# EAGLE board brd1 (EAGLE 7.3.0)
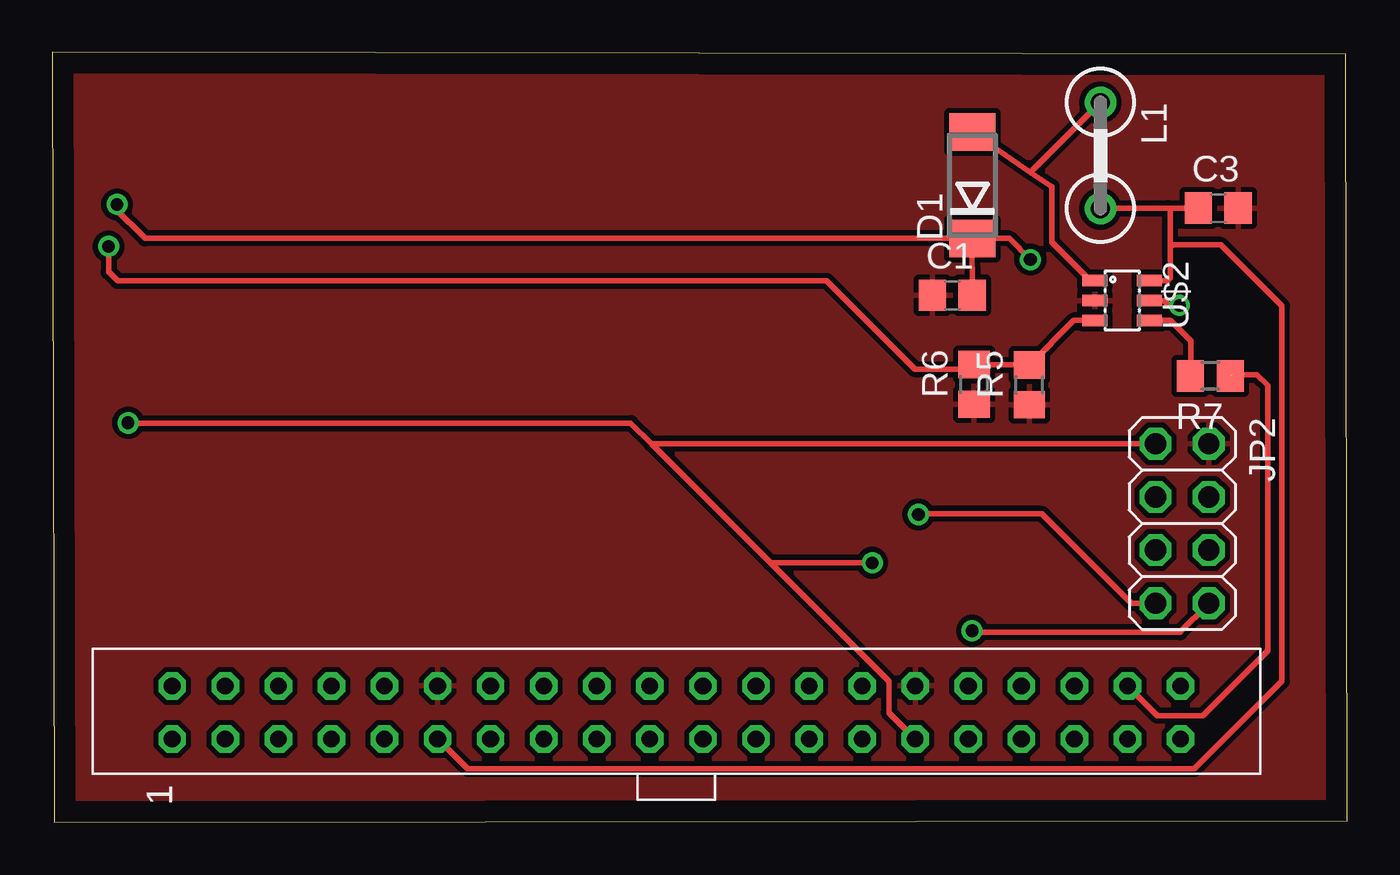
[diagram p0: board, top side]
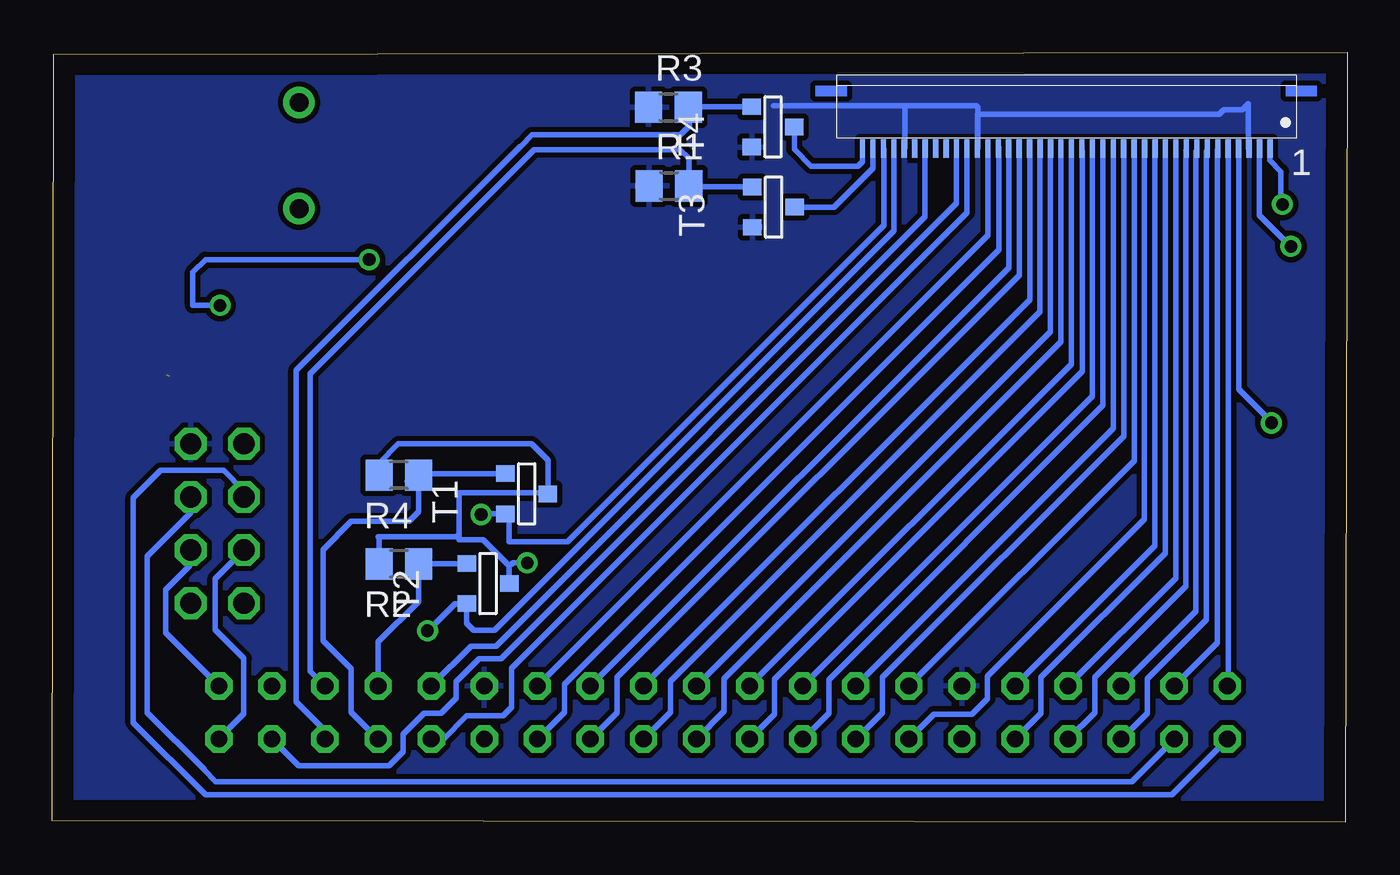
[diagram p1: board, bottom side, seen from below]

Size 61.98 x 36.85 mm. Coordinates in mm from the lower left corner, seen from the top.
Outline: 0.1,0 61.98,0.08 61.9,36.74 0,36.85 0.1,0
Copper layers (1*16): Top 0.035mm / dielectric 1.5mm / Bottom 0.035mm
Design rules "default": minimum track width 10mil, minimum drill 24mil, track to track 8mil, track to pad 8mil, pad to pad 8mil, via to via 8mil, smd to smd 8mil, copper to edge 40mil, drill to drill 8mil, minimum pad ring 10mil, minimum via ring 8mil, stop-mask expansion 4mil, vias tented up to drill 0mil, thermal gap 10mil

## Footprints (pad centres in the part's own frame; a part is rotated, then mirrored left to right if it is on the bottom)
C0805 = smd 1.3 x 1.5: 1 -0.95,0; 2 0.95,0
DO214AA = smd 1.8 x 2.2: A 2.55,0; C -2.55,0
2X04 = drill 1.016 octagon: 1 -3.81,-1.27; 2 -3.81,1.27; 3 -1.27,-1.27; 4 -1.27,1.27; 5 1.27,-1.27; 6 1.27,1.27; 7 3.81,-1.27; 8 3.81,1.27
BL02RN2 = drill 0.9 pad 1.5: 1 -2.54,0; 2 2.54,0
R0805 = smd 1.3 x 1.5: 1 -0.95,0; 2 0.95,0
SOT-23 = smd 0.787 x 0.889: 1 0.025,-1.016; 2 -0.94,1.016; 3 0.991,1.016
HEADER20X2POL = drill 0.8 octagon: P$1 0,22.86; P$2 2.54,22.86; P$3 0,20.32; P$4 2.54,20.32; P$5 0,17.78; P$6 2.54,17.78; P$7 0,15.24; P$8 2.54,15.24; P$9 0,12.7; P$10 2.54,12.7; P$11 0,10.16; P$12 2.54,10.16; P$13 0,7.62; P$14 2.54,7.62; P$15 0,5.08; P$16 2.54,5.08; P$17 0,2.54; P$18 2.54,2.54; P$19 0,0; P$20 2.54,0; P$21 0,-2.54; P$22 2.54,-2.54; P$23 0,-5.08; P$24 2.54,-5.08; P$25 0,-7.62; P$26 2.54,-7.62; P$27 0,-10.16; P$28 2.54,-10.16; P$29 0,-12.7; P$30 2.54,-12.7; P$31 0,-15.24; P$32 2.54,-15.24; P$33 0,-17.78; P$34 2.54,-17.78; P$35 0,-20.32; P$36 2.54,-20.32; P$37 0,-22.86; P$38 2.54,-22.86; P$39 0,-25.4; P$40 2.54,-25.4
AME = smd 0.55 x 1.2: 1 -0.95,-1.3; 2 0,-1.3; 3 0.95,-1.3; 4 0.95,1.3; 5 0,1.3; 6 -0.95,1.3
FPC_ZIF_40 = smd 0.25 x 0.9: P$1 0.5,3.5; P$2 1,3.5; P$3 1.5,3.5; P$4 2,3.5; P$5 2.5,3.5; P$6 3,3.5; P$7 3.5,3.5; P$8 4,3.5; P$9 4.5,3.5; P$10 5,3.5; P$11 5.5,3.5; P$12 6,3.5; P$13 6.5,3.5; P$14 7,3.5; P$15 7.5,3.5; P$16 8,3.5; P$17 8.5,3.5; P$18 9,3.5; P$19 9.5,3.5; P$20 10,3.5; P$21 10.5,3.5; P$22 11,3.5; P$23 11.5,3.5; P$24 12,3.5; P$25 12.5,3.5; P$26 13,3.5; P$27 13.5,3.5; P$28 14,3.5; P$29 14.5,3.5; P$30 15,3.5; P$31 15.5,3.5; P$32 16,3.5; P$33 16.5,3.5; P$34 17,3.5; P$35 17.5,3.5; P$36 18,3.5; P$37 18.5,3.5; P$38 19,3.5; P$39 19.5,3.5; P$40 20,3.5

## Placement (x,y rotation side)
C1  [C0805]  43.08,25.22 0 top
C3  [C0805]  55.8,29.39 0 top
D1  [DO214AA]  44.04,30.48 90 top
JP2  [2X04]  54.08,14.3 270 top
L1  BL02RN2  [BL02RN2]  50.17,31.9 270 top
R1  [R0805]  32.46,30.45 0 bottom
R2  [R0805]  45.39,12.37 180 bottom
R3  [R0805]  32.49,34.21 0 bottom
R4  [R0805]  45.39,16.61 180 bottom
R5  [R0805]  46.76,20.93 90 top
R6  [R0805]  44.12,20.96 90 top
R7  [R0805]  55.42,21.36 180 top
T1  [SOT-23]  39.27,15.7 90 bottom
T2  [SOT-23]  41.12,11.4 90 bottom
T3  [SOT-23]  27.46,29.41 90 bottom
T4  [SOT-23]  27.48,33.25 90 bottom
U$1  DE0_40PIN_HEADER  [HEADER20X2POL]  28.6,3.99 90 top
U$2  AME  [AME]  51.21,24.97 270 top
U$3  FPC_ZIF_PSP40  [FPC_ZIF_40]  3.2,35.74 180 bottom

## Library data of the parts
C1 R7 = rcl
C3 R1-R6 = resistor
D1 = diode
JP2 = pinhead
L1 = inductors
T1-T4 = zetex; OC_FARNELL: unknown; OC_NEWARK: unknown
U$1 U$3 = flolib
U$2 = AME

## Nets
+3V3: JP2.1 R2.2 R4.2 T1.1 T2.1 U$1.P$29 U$3.P$4
+5V: C3.1 L1.2 U$1.P$11 U$2.6
GND: C1.1 C3.2 JP2.2 R1.1 R3.1 R5.1 R6.1 T3.2 T4.2 U$1.P$12 U$1.P$30 U$2.2 U$3.P$3 U$3.P$29 U$3.P$36
N$1: U$1.P$2 U$3.P$5
N$2: U$1.P$4 U$3.P$6
N$3: R2.1 T2.3 U$1.P$34
N$4: R3.2 T4.3 U$1.P$35
N$5: U$1.P$5 U$3.P$7
N$6: U$1.P$6 U$3.P$8
N$7: U$1.P$7 U$3.P$9
N$8: U$1.P$8 U$3.P$10
N$9: D1.A L1.1 U$2.1
N$10: U$1.P$9 U$3.P$11
N$11: U$1.P$10 U$3.P$12
N$12: U$1.P$13 U$3.P$13
N$13: U$1.P$14 U$3.P$14
N$14: U$1.P$15 U$3.P$15
N$15: U$1.P$16 U$3.P$16
N$16: U$1.P$17 U$3.P$17
N$17: U$1.P$18 U$3.P$18
N$18: U$1.P$19 U$3.P$19
N$19: U$1.P$20 U$3.P$20
N$20: U$1.P$21 U$3.P$21
N$21: U$1.P$22 U$3.P$22
N$22: U$1.P$23 U$3.P$23
N$23: U$1.P$24 U$3.P$24
N$24: U$1.P$25 U$3.P$25
N$25: U$1.P$26 U$3.P$26
N$26: U$1.P$27 U$3.P$27
N$27: R7.2 U$2.4
N$28: U$1.P$28 U$3.P$28
N$29: U$1.P$31 U$3.P$30
N$30: U$1.P$32 U$3.P$34
N$32: JP2.8 T2.2 U$3.P$37
N$33: JP2.7 T1.2 U$3.P$38
N$34: T3.1 U$3.P$39
N$35: T4.1 U$3.P$40
N$36: JP2.3 U$1.P$1
N$37: JP2.4 U$1.P$3
N$38: R7.1 U$1.P$38
N$39: U$1.P$37 U$3.P$31
N$40: R1.2 T3.3 U$1.P$36
N$41: JP2.5 U$1.P$39
N$42: JP2.6 U$1.P$40
N$43: R4.1 T1.3 U$1.P$33
V+: C1.2 D1.C U$2.5 U$3.P$1
V-: R5.2 R6.2 U$2.3 U$3.P$2

## Tracks (layer width: path | path; a pad name or v marks a point on that pad's centre or on a via)
+3V3  (via drill 0.6)
  Top 0.254: v3.63,19.13 v3.63,19.1 27.69,19.1 28.68,18.11 | 28.68,18.11 34.1,12.69 34.37,12.42 | 34.37,12.42 40.03,6.76 40.03,5.26 U$1.P$29 | JP2.1 28.68,18.11 | v39.24,12.42 34.37,12.42
  Bottom 0.254: U$3.P$4 5.2,20.72 3.76,19.28 3.68,19.18 v3.63,19.13 | T2.1 40.11,12.27 | 40.11,12.27 41.35,13.51 42.49,13.51 42.49,13.79 | 42.49,13.79 42.49,15.77 38.25,15.77 T1.1 38.25,17.32 39.04,18.11 45.42,18.11 46.34,17.19 R4.2 | R2.2 46.34,13.62 46.38,13.66 42.62,13.66 42.49,13.79 | v39.24,12.42 39.93,12.42 40.01,12.34 40.11,12.27
+5V
  Top 0.254: U$2.6 53.38,25.92 53.52,26.06 53.52,27.51 | 53.52,27.51 53.52,29.38 | 53.52,29.38 C3.1 | U$1.P$11 18.47,3.99 19.89,2.57 54.66,2.57 58.85,6.76 58.85,24.71 55.93,27.63 53.64,27.63 53.52,27.51 | L1.2 50.19,29.39 53.39,29.39 53.52,29.38
GND
  Bottom 0.254: U$3.P$3 4.72,32.26 4.72,34.39 5.03,34.09 5.92,34.09 6.12,33.88 17.7,33.88 U$3.P$29 17.68,32.26 17.68,34.21 17.75,34.29 21.16,34.29 | 21.16,34.29 27.46,34.29 | U$3.P$36 21.16,32.28 21.16,34.29
  pour Bottom (isolate 0.254): 0.18,36.88 61.87,36.88 61.87,0.08 0.18,0.08
  pour Top (isolate 0.254): 0.1,36.8 61.93,36.8 61.93,0.1 0.1,0.1
N$1
  Bottom 0.254: U$3.P$5 5.7,6.57 U$1.P$2
N$2
  Bottom 0.254: U$3.P$6 6.2,32.2 6.22,32.18 6.22,8.58 U$1.P$4
N$3
  Bottom 0.254: U$1.P$34 46.38,8.64 44.45,10.57 R2.1 42.16,12.37 T2.3
N$4
  Bottom 0.254: T4.3 31.51,34.24 R3.2 31.47,34.15 31.47,33.32 31.9,32.89 39.01,32.89 39.55,32.36 39.57,32.36 50.29,21.64 50.29,5.77 48.92,4.39 U$1.P$35
N$5
  Bottom 0.254: U$3.P$7 6.7,32.16 6.76,32.11 6.76,9.7 9.58,6.88 9.58,5.23 U$1.P$5
N$6
  Bottom 0.254: U$3.P$8 7.2,32.14 7.24,32.11 7.24,10.11 U$1.P$6
N$7
  Bottom 0.254: U$3.P$9 7.7,32.15 7.72,32.13 7.72,11.3 12.09,6.93 12.09,5.26 U$1.P$7
N$8
  Bottom 0.254: U$3.P$10 8.2,11.69 U$1.P$8
N$9
  Top 0.254: U$2.1 49.67,25.92 47.83,27.76 47.83,30.41 46.85,31.09 | 46.85,31.09 D1.A | L1.1 46.91,31.19 46.85,31.09
N$10
  Bottom 0.254: U$3.P$11 8.7,12.89 14.66,6.93 14.66,5.23 U$1.P$9
N$11
  Bottom 0.254: U$3.P$12 9.2,13.23 U$1.P$10
N$12
  Bottom 0.254: U$3.P$13 9.7,14.51 17.22,6.98 17.22,5.92 17.96,5.18 19.79,5.18 U$1.P$13
N$13
  Bottom 0.254: U$3.P$14 10.2,17.31 U$1.P$14
N$14
  Bottom 0.254: U$3.P$15 10.7,18.48 22.25,6.93 22.25,5.26 U$1.P$15
N$15
  Bottom 0.254: U$3.P$16 11.2,18.85 U$1.P$16
N$16
  Bottom 0.254: U$3.P$17 11.7,19.95 24.82,6.83 24.82,5.23 U$1.P$17
N$17
  Bottom 0.254: U$3.P$18 12.2,20.39 U$1.P$18
N$18
  Bottom 0.254: U$3.P$19 12.7,32.13 12.67,32.11 12.67,21.59 27.41,6.86 27.41,5.18 U$1.P$19
N$19
  Bottom 0.254: U$3.P$20 13.2,21.93 U$1.P$20
N$20
  Bottom 0.254: U$3.P$21 13.7,23 29.82,6.88 29.82,5.31 U$1.P$21
N$21
  Bottom 0.254: U$3.P$22 14.2,23.47 U$1.P$22
N$22
  Bottom 0.254: U$3.P$23 14.7,24.44 32.39,6.76 32.39,5.28 U$1.P$23
N$23
  Bottom 0.254: U$3.P$24 15.2,25.01 U$1.P$24
N$24
  Bottom 0.254: U$3.P$25 15.7,26.18 34.95,6.93 34.95,5.26 U$1.P$25
N$25
  Bottom 0.254: U$3.P$26 16.2,32.35 16.21,32.36 16.21,26.54 U$1.P$26
N$26
  Bottom 0.254: U$3.P$27 16.7,32.27 16.66,32.31 16.66,27.41 37.47,6.6 37.47,5.28 U$1.P$27
N$27
  Top 0.254: U$2.4 53.5,24.02 54.48,23.04 54.48,21.37 R7.2
N$28
  Bottom 0.254: U$3.P$28 17.2,28.09 U$1.P$28
N$29
  Bottom 0.254: U$3.P$30 18.2,29.17 40.01,7.37 40.01,5.51 40.41,5.11 42.14,5.11 43.28,3.96 43.87,3.96 U$1.P$31
N$30
  Bottom 0.254: U$3.P$34 20.2,28.97 40.74,8.43 41.94,8.43 U$1.P$32
N$32  (via drill 0.6)
  Top 0.254: JP2.8 55.35,10.46 53.98,9.09 44.17,9.09 44.12,9.14 v44.02,9.17
  Bottom 0.254: U$3.P$37 21.7,28.31 40.82,9.19 41.81,9.19 42.14,9.52 T2.2 42.7,10.46 43.89,9.27 v44.02,9.17 43.97,9.17
N$33  (via drill 0.6)
  Top 0.254: JP2.7 51.64,10.49 47.37,14.76 41.5,14.76 41.48,14.73 v41.45,14.73
  Bottom 0.254: U$3.P$38 22.17,32.21 22.17,28.57 37.31,13.44 40.11,13.44 40.11,14.73 40.13,14.76 T1.2 41.33,14.76 v41.45,14.73 41.43,14.73
N$34
  Bottom 0.254: U$3.P$39 22.7,31.3 24.56,29.44 T3.1
N$35
  Bottom 0.254: U$3.P$40 23.2,31.61 23.42,31.39 25.65,31.39 26.47,32.21 T4.1
N$36
  Bottom 0.254: U$1.P$1 8.41,1.32 54.64,1.32 58.09,4.77 58.09,15.54 56.79,16.84 53.77,16.84 52.81,15.87 JP2.3
N$37
  Bottom 0.254: JP2.4 55.35,14.81 57.43,12.73 57.43,5.26 54.71,2.54 54.71,2.51 54.15,1.96 10.31,1.96 U$1.P$3
N$38  (1 unrouted)
  Top 0.254: 56.49,21.41 57.66,21.41 58.17,20.9 58.17,8.2 55.07,5.11 52.88,5.11 U$1.P$38
N$39
  Bottom 0.254: U$3.P$31 18.7,29.61 40.49,7.82 41.55,7.82 42.65,6.73 42.65,5.94 43.36,5.23 44.17,5.23 45.19,4.22 45.19,3.38 45.85,2.72 50.19,2.72 U$1.P$37
N$40
  Bottom 0.254: U$1.P$36 49.63,7.24 49.63,21.46 38.91,32.18 31.93,32.18 31.51,31.76 R1.2 31.46,30.4 T3.3
N$41
  Bottom 0.254: U$1.P$39 54,4.01 52.81,5.21 52.81,7.85 54.18,9.22 54.18,11.66 JP2.5
N$42
  Bottom 0.254: JP2.6 55.37,13.03 55.4,13 55.4,12.27 56.54,11.12 56.54,9.07 U$1.P$40
N$43
  Bottom 0.254: U$1.P$33 47.68,5.28 47.68,7.34 49.02,8.69 49.02,13.06 47.68,14.4 44.91,14.4 44.44,14.87 R4.1 44.72,16.33 44.98,16.33 44.63,16.69 T1.3
V+  (via drill 0.6)
  Top 0.254: 44.02,27.94 C1.2 | 44.02,27.94 44.04,27.94 D1.C 44.15,27.94 45.8,27.94 v46.81,26.92 | v53.95,24.74 53.44,24.74 53.21,24.97 U$2.5 | 44.02,27.94 4.45,27.94 2.97,29.41 3.05,29.51 v3.1,29.57
  Bottom 0.254: v53.95,24.74 55.25,24.74 55.25,26.31 54.64,26.92 v46.81,26.92 | 3.1,29.95 v3.1,29.57 3.18,30.05 3.18,31.14 3.71,31.67 U$3.P$1
V-  (via drill 0.6)
  Top 0.254: U$2.3 48.9,24.02 R5.2 46.74,21.9 R6.2 43.91,21.69 41.28,21.69 37.06,25.91 3.12,25.91 2.69,26.34 v2.69,27.56
  Bottom 0.254: U$3.P$2 4.2,29.04 2.71,27.55 | 2.71,27.55 2.69,27.53 | v2.69,27.56 2.71,27.55